# Altium PCB PCB3.PcbDoc
Units mm, origin at the board's own origin, x right, y up, seen from the top; angles counter-clockwise.
Board outline 122 x 63 mm, 3 copper layers (Top Layer, Internal Plane 1, Bottom Layer), stack 0.427 mm thick; 32 components, 32 nets, 124 pads, 30 vias.
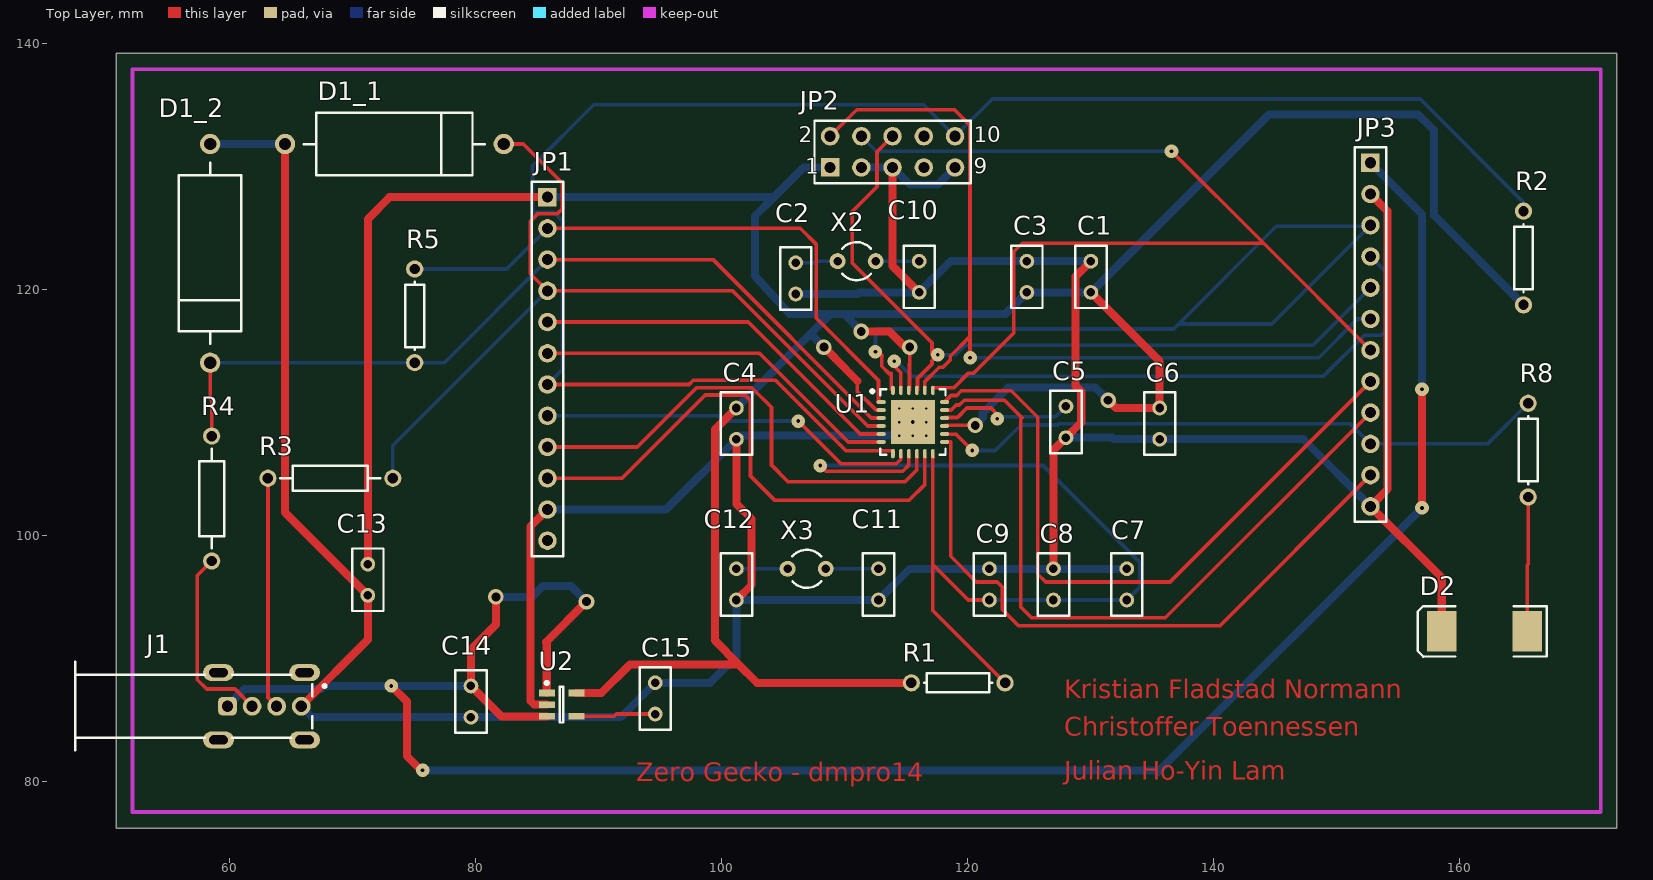
[diagram p0: Top Layer view]
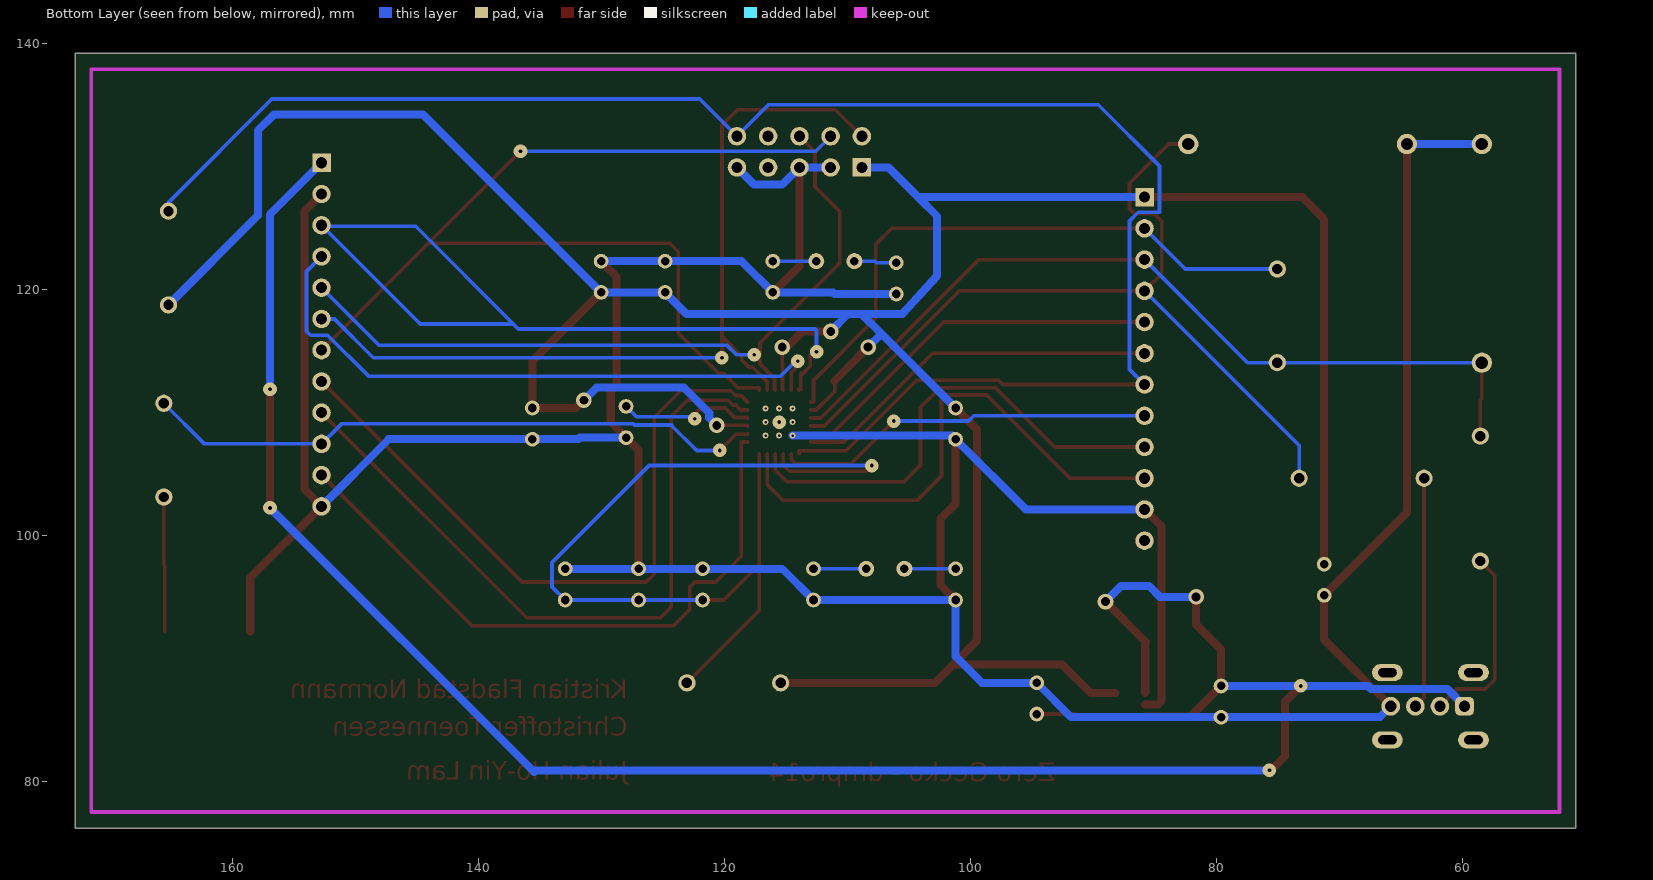
[diagram p1: Bottom Layer view, seen from below]
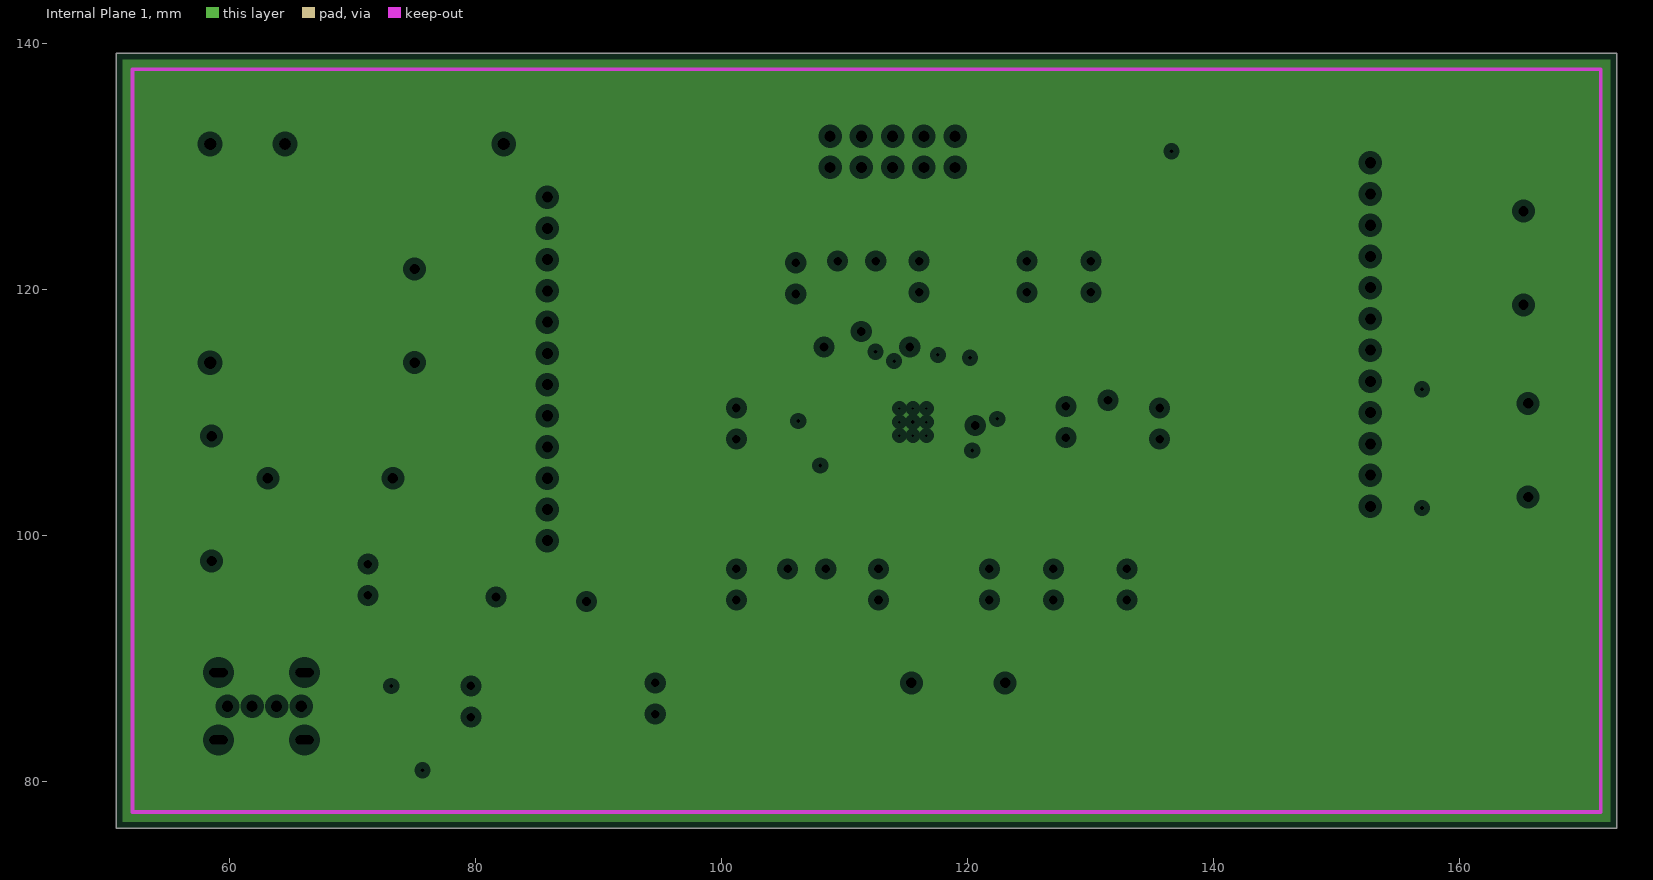
[diagram p2: Internal Plane 1, clearances drawn from the general rule]

## Layer stack, top to bottom
Top Solder: solder mask 0.0102, Solder Resist, Dk 3.5
Top Layer: signal copper 0.0356
Internal Plane 1: plane copper 0.0356
Dielectric 1: dielectric 0.32, FR-4, Dk 4.8
Bottom Layer: signal copper 0.0356
Bottom Solder: solder mask 0.0102, Solder Resist, Dk 3.5

## Board outline
50.8,76.2 172.8,76.2 172.8,139.2 50.8,139.2

## Design rules (kind name [scope] priority, off if disabled: settings)
Clearance [All] p1: gap=0.3
PlaneClearance [All] p1: clearance=0.508
PlaneConnect [All] p1: planeconnectstyle=Relief reliefexpansion=0.508 reliefentries=4 reliefconductorwidth=0.254 reliefairgap=0.254
PolygonConnect [All] p1: connectstyle=Relief reliefconductorwidth=0.254 reliefentries=4 polygonreliefangle="90 Angle" airgapwidth=0.254
RoutingVias RoutingVias_Signals [Not(InNet('GND') AND InNet('VDD') AND InNet('NetC14_2'))] p1: holewidth=0.3 width=1.1 viastyle="Through Hole" minholewidth=0.3 minwidth=1.1 maxholewidth=0.711 maxwidth=1.27
RoutingVias [All] p2: holewidth=0.8 width=1.6 viastyle="Through Hole" minholewidth=0.711 minwidth=1.27 maxholewidth=0.711 maxwidth=1.27
SolderMaskExpansion [All] p1: expansion=0.102
UnpouredPolygon [All] p1: allowunpoured=FALSE
Width Width_GDD_VDD_or_(NetC14_2) [(InNet('GND') OR InNet('VDD') OR InNet('NetC14_2'))] p1: maxlimit=0.653 minlimit=0.653 preferedwidth=0.653 // The tutorial wanted 25 mil width on these -> 0.653mm
Width [All] p2: maxlimit=0.3 minlimit=0.3 preferedwidth=0.3
27 further rules are at their usual default settings.

## Components (designator, comment, footprint, x,y, rotation, side; value= is the part's Value field where it differs from the comment)
C1 "Cap" RAD-0.1 130.048,121.031 r270 top
C2 "Cap" RAD-0.1 106.045,120.904 r90 top
C3 "Cap" RAD-0.1 124.841,121.031 r270 top
C4 "Cap" RAD-0.1 101.219,109.093 r90 top
C5 "Cap" RAD-0.1 128.016,109.22 r90 top
C6 "Cap" RAD-0.1 135.636,109.093 r90 top
C7 "Cap" RAD-0.1 132.969,96.012 r270 top
C8 "Cap" RAD-0.1 127,96.012 r270 top
C9 "Cap" RAD-0.1 121.793,96.012 r270 top
C10 "Cap" RAD-0.1 116.078,121.031 r90 top
C11 "Cap" RAD-0.1 112.776,96.012 r90 top
C12 "Cap" RAD-0.1 101.219,96.012 r90 top
C13 "Cap" RAD-0.1 71.247,96.393 r90 top
C14 "Cap" RAD-0.1 79.629,86.487 r90 top
C15 "Cap" RAD-0.1 94.615,86.741 r270 top
D1_1 "D Zener" DIODE-0.7 73.406,131.826 r0 top
D1_2 "D Zener" DIODE-0.7 58.42,122.936 r270 top
D2 "Diode" SMC 162.052,92.202 r180 top
J1 "48204-0001" MOLX-48204-0001_V 52.1,86.106 r270 top
JP1 "Header 12" HDR1X12 85.852,127.508 r270 top
JP2 "Header 5X2" HDR2X5 108.839,129.921 r0 top
JP3 "Header 12" HDR1X12 152.781,130.302 r270 top
R1 "Res1 10K" AXIAL-0.3 119.253,88.011 r180 top
R2 "Res1" AXIAL-0.3 165.227,122.555 r270 top
R3 "USB SPEC" AXIAL-0.4 68.199,104.648 r0 top
R4 "USB SPEC" AXIAL-0.4 58.547,102.997 r90 top
R5 "1.5K" AXIAL-0.3 75.057,117.856 r90 top
R8 "390" AXIAL-0.3 165.608,106.934 r270 top
U1 "EFM32ZG108F16-QFN24" ENMR-QFN24_M 115.57,109.22 r0 top
U2 "LT1761ES5-3.3#TRMPBF" LT-S5-5-TSOT-23_N 86.995,86.233 r0 top
X2 "XTAL" R38 110.998,122.301 r270 top
X3 "XTAL" R38 106.934,97.282 r90 top

## Footprints (in the part's own frame and the unit in brackets; to place one, negate y for a bottom-side part, rotate by r counter-clockwise, add the part's x,y. Pads: shape width x height; smd on the part's side, far side on the other; paste and mask are expansions set on the pad)
AXIAL-0.3 [mm] "Axial Device, Thru-Hole; 2 Leads; 0.3 in Pin Spacing"
  round 1.4 hole 0.85: 1(-3.81,0) 2(3.81,0)
  silkscreen extent -2.77,-0.76 2.77,0.76
AXIAL-0.4 [mm] "Axial Device, Thru-Hole; 2 Leads; 0.4 in Pin Spacing"
  round 1.4 hole 0.85: 1(-5.08,0) 2(5.08,0)
  silkscreen extent -4.06,-1.02 4.06,1.02
DIODE-0.7 [mm] "Diode, Thru-Hole; 2 Leads; 0.7 in Pin Spacing"
  round 1.65 hole 1: 1(-8.89,0) 2(8.89,0)
  silkscreen extent -7.37,-2.54 7.37,2.54
ENMR-QFN24_M [mm] "QFN, 24-Leads, Body 5x5mm, Pitch 0.65mm, Thermal Pad 3.6 x 3.6mm, IPC Low Density"
  rect 3.6x3.6 smd: 0(0,0)
  oval 0.75x0.3 smd: 1(-2.575,1.625) 2(-2.575,0.975) 3(-2.575,0.325) 4(-2.575,-0.325) 5(-2.575,-0.975) 6(-2.575,-1.625) 13(2.575,-1.625) 14(2.575,-0.975) 15(2.575,-0.325) 16(2.575,0.325) 17(2.575,0.975) 18(2.575,1.625)
  oval 0.3x0.75 smd: 7(-1.625,-2.575) 8(-0.975,-2.575) 9(-0.325,-2.575) 10(0.325,-2.575) 11(0.975,-2.575) 12(1.625,-2.575) 19(1.625,2.575) 20(0.975,2.575) 21(0.325,2.575) 22(-0.325,2.575) 23(-0.975,2.575) 24(-1.625,2.575)
  silkscreen extent -3.42,-2.65 2.65,2.65, body extent -2.5,-2.5 2.5,2.5, height 0.9
HDR1X12 [mm] "Connector; Header; 12 Position"
  rect 1.5x1.5 hole 0.9: 1(0,0)
  round 1.5 hole 0.9: 2(2.54,0) 3(5.08,0) 4(7.62,0) 5(10.16,0) 6(12.7,0) 7(15.24,0) 8(17.78,0) 9(20.32,0) 10(22.86,0) 11(25.4,0) 12(27.94,0)
  silkscreen extent -1.27,-1.27 29.21,1.27
HDR2X5 [mm] "Connector; Header; 5x2 Position"
  rect 1.5x1.5 hole 0.9: 1(0,0)
  round 1.5 hole 0.9: 2(0,2.54) 3(2.54,0) 4(2.54,2.54) 5(5.08,0) 6(5.08,2.54) 7(7.62,0) 8(7.62,2.54) 9(10.16,0) 10(10.16,2.54)
  silkscreen extent -1.27,-1.27 11.43,3.81
LT-S5-5-TSOT-23_N [mm] "SOT23, 5-Leads, Body 2.90x1.63mm, Pitch 0.95mm, IPC Medium Density"
  rect 1.3x0.55 smd: 1(-1.2,0.95) 2(-1.2,0) 3(-1.2,-0.95) 4(1.2,-0.95) 5(1.2,0.95)
  silkscreen extent -1.32,-1.45 0.15,1.9, body extent -0.87,-1.45 0.87,1.45, height 1
MOLX-48204-0001_V [mm] "USB Type-A Up-Right Reverse Connector"
  rrect50% 1.52x1.52 hole 0.9: 1(0,7.73)
  round 1.52 hole 0.9: 2(0,9.73) 3(0,11.73) 4(0,13.73)
  oval 1.4x2.5 hole 0.75 slot 1.5 at 90 deg: MH1(-2.735,7) MH2(2.735,7) MH3(-2.735,14) MH4(2.735,14)
  silkscreen extent -3.6,-4.64 3.6,15.75, body extent -3.61,-4.71 3.59,14.54, height 14.68
R38 [mm] "Crystal, Thru-Hole; 2 Leads; Body 3.1 x 8.2 mm (Dia.xH)"
  round 1.3 hole 0.7: 1(0,1.55) 2(0,-1.55)
  silkscreen extent -1.55,-1.19 1.55,1.17
RAD-0.1 [mm] "Radial Cap, Thru-Hole; 2 Leads; 0.1 in Pin Spacing"
  round 1.2 hole 0.7: 1(-1.27,0) 2(1.27,0)
  silkscreen extent -2.54,-1.27 2.54,1.27
SMC [mm] "DO-214-AB/SMC; 2 C-Bend Leads; Body 7.9 x 5.9 mm, inc. leads (LxW)"
  rect 2.4x3.3 smd: 1(-3.475,0) 2(3.475,0)
  silkscreen extent -5.08,-2.05 5.42,2.06

## Part data
C1 C2 C3 C4 C5 C6 C7 C8 C9 C10 C11 C12 C13 C14 C15: "Capacitor"
D1_1 D1_2: "Zener Diode"
D2: "Default Diode"
J1: library part CMP-0411-00001-1, "USB Shielded I/O Receptacle, Type A"
JP1 JP3: "Header, 12-Pin"
JP2: "Header, 5-Pin, Dual row"
R1 R5 R8: library part Res1, "Resistor"
R2: "Resistor"
R3 R4: library part Res2, "Resistor"
U1: library part CMP-0270-00117-1, "EFM32 Zero Gecko, M0+ ARM Cortex CPU, 16 KB Flash, 4 KB RAM, 1.85 - 3.8 V Supply, 32 MHz Max Speed, -40 to 85 degC, 24-Pin QFN, RoHS Compliant"
U2: library part CMP-0476-01224-1, "100 mA, Low Noise, LDO Micropower Regulator, 1.8 to 20 V Vin, 3.3 V Vout, 5-pin SOT23 (S5-5), -40 to 125 degC, Pb-Free, Mini Tape and Reel"
X2 X3: "Crystal Oscillator"

## Via types
v1: diameter 1.1, hole 0.3, Top Layer to Bottom Layer, 14 vias
v2: diameter 0.5, hole 0.2, Top Layer to Bottom Layer, 9 vias
v3: diameter 1.27, hole 0.711, Top Layer to Bottom Layer, 7 vias

## Nets (pads, with @x,y where several pads share a name; then routed paths per layer and width w, separated by ;. In a path a pad name is that pad's centre, name@x,y a point inside that pad or via, vN(x,y) a via of type N, cw(c..) or ccw(c..) an arc to the next point about the centre after c; other vN are vias at no path point)
GND: C1.1 C2.1 C3.1 C4.1 C5.1 C6.1 C7.1 C8.1 C9.1 C10.1 C11.1 C12.1 C13.1 C14.1 C15.1 D1_1.1 D1_2.1 D2.2 J1.4 JP1.11 JP2.3 JP2.5 JP2.9 JP3.2 JP3.12 U1.0 U2.2 | length 332.7
  Top Layer w0.653: D1_1.1 64.516,101.854 C13.1 71.247,91.523 J1.4 ; U2.2 84.772,86.233 84.455,86.55 84.455,100.711 JP1.11 ; C12.1 102.464,95.987 102.464,101.321 101.219,102.565 C4.1 ; JP2.5 113.919,121.92 C10.1 ; C8.1 127,106.934 C5.1 129.261,109.195 129.261,111.709 128.803,112.166 128.803,121.056 C1.1 ; JP3.2 154.178,126.365 154.178,103.759 JP3.12 158.577,96.566 D2.2
  Bottom Layer w0.653: D1_2.1 D1_1.1 ; J1.4 66.719,85.217 C14.1 91.821,85.217 C15.1 99.06,88.011 101.219,90.17 C12.1 C11.1 115.316,97.282 C9.1 C8.1 C7.1 ; JP1.11 95.504,102.108 C4.1 101.516,108.12 105.761,108.12 107.358,108.12 v2(114.47,108.12) ; C2.1 111.074,119.634 111.201,119.761 C10.1 118.618,122.301 C3.1 C1.1 ; JP2.3 JP2.5 115.316,128.524 117.602,128.524 JP2.9 ; C5.1 131.75,107.95 131.877,107.823 C6.1 147.32,107.823 JP3.12
  other v1: 115.57,109.22
  other v2: 115.57,108.12 116.67,108.12 114.47,109.22 115.57,109.22 116.67,109.22 114.47,110.32 115.57,110.32 116.67,110.32
NetC2_2: C2.2 X2.2 | length 3.5
  Bottom Layer w0.3: C2.2 107.671,122.174 107.798,122.301 X2.2
NetC5_2: C5.2 U1.16 | length 11.2
  Top Layer w0.3: U1.16 118.195,109.595 119.189,109.595 119.957,110.363 121.92,110.363 122.428,109.855 v1(122.428,109.474)
  Bottom Layer w0.3: v1(122.428,109.474) 122.598,109.644 127.17,109.644 C5.2
NetC7_2: C7.2 C8.2 C9.2 R1.1 U1.9 U1.12 | length 79.3
  Top Layer w0.3: v1(108.032,105.679) 108.491,105.22 114.737,105.22 115.245,105.727 U1.9 ; U1.12 117.195,97.614 ; C9.2 120.067,94.742 117.195,97.614 ; R1.1 117.195,93.879 117.195,97.614
  Bottom Layer w0.3: v1(108.032,105.679) 126.147,105.679 134.036,97.79 134.036,95.809 C7.2 C8.2 C9.2
NetC10_2: C10.2 X2.1 | length 3.5
  Bottom Layer w0.3: X2.1 C10.2
NetC11_2: C11.2 X3.2 | length 4.3
  Bottom Layer w0.3: X3.2 C11.2
NetC12_2: C12.2 X3.1 | length 4.2
  Bottom Layer w0.3: C12.2 X3.1
NetC14_2: C14.2 J1.1 JP3.1 U2.1 U2.3 | length 180.9
  Top Layer w0.653: v1(73.152,87.757) 74.422,86.487 74.422,82.042 75.565,80.899 v1(75.692,80.899) ; v3(81.661,94.996) 81.661,92.742 79.629,90.71 C14.2 82.103,85.283 U2.3 ; U2.1 85.795,91.243 85.725,91.313 v3(89.027,94.615) ; v1(156.972,102.235) v1(156.972,111.887)
  Bottom Layer w0.653: J1.1 61.227,87.503 67.437,87.503 67.691,87.757 v1(73.152,87.757) C14.2 ; v1(75.692,80.899) 135.382,80.899 135.509,80.772 v1(156.972,102.235) ; v3(81.661,94.996) 84.582,94.996 85.471,95.885 87.757,95.885 v3(89.027,94.615) ; JP3.1 156.972,126.111 v1(156.972,111.887)
NetC15_2: C15.2 U2.4 | length 6.5
  Top Layer w0.3: U2.4 91.288,85.283 91.476,85.471 C15.2
NetD1_1_2: D1_1.2 JP1.4 R3.2 U1.4 | length 69.6
  Top Layer w0.3: D1_1.2 83.883,131.826 87.071,128.638 87.071,126.562 86.677,126.168 85.09,126.168 84.455,125.533 84.455,121.285 JP1.4 100.902,119.888 111.895,108.895 U1.4
  Bottom Layer w0.3: R3.2 73.279,107.315 JP1.4
NetD1_2_2: D1_2.2 JP1.3 R4.2 R5.1 U1.3 | length 69.4
  Top Layer w0.3: D1_2.2 58.42,111.125 58.547,110.998 R4.2 ; JP1.3 99.309,122.428 112.192,109.545 U1.3
  Bottom Layer w0.3: D1_2.2 R5.1 77.47,114.046 JP1.3
NetD2_1: D2.1 R8.2 | length 11
  Top Layer w0.3: D2.1 165.527,97.582 165.608,97.663 R8.2
NetJ1_2: J1.2 R4.1 | length 15.5
  Top Layer w0.3: R4.1 57.379,96.749 57.379,88.265 58.141,87.503 60.433,87.503 J1.2
NetJ1_3: J1.3 R3.1 | length 18.8
  Top Layer w0.3: R3.1 63.119,86.817 J1.3
NetJP1_2: JP1.2 R5.2 U1.1 | length 49.7
  Top Layer w0.3: JP1.2 106.401,124.968 107.721,123.647 107.721,117.653 112.776,112.598 112.776,110.845 U1.1
  Bottom Layer w0.3: R5.2 82.55,121.666 JP1.2
NetJP1_5: JP1.5 U1.5 | length 30.9
  Top Layer w0.3: JP1.5 102.187,117.348 111.29,108.245 U1.5
NetJP1_6: JP1.6 U1.6 | length 30.1
  Top Layer w0.3: JP1.6 103.099,114.808 110.312,107.595 U1.6
NetJP1_7: JP1.7 JP2.10 R2.1 U1.7 | length 140.3
  Top Layer w0.3: JP1.7 97.358,112.268 97.703,112.613 104.389,112.613 110.123,106.879 113.945,106.879 U1.7
  Bottom Layer w0.3: JP1.7 87.071,113.487 87.071,125.578 86.36,126.289 84.633,126.289 84.633,130.048 89.611,135.026 116.434,135.026 JP2.10 122.022,135.484 156.82,135.484 165.227,127.076 R2.1
NetJP1_8: JP1.8 U1.8 | length 31
  Top Layer w0.3: v1(106.248,109.296) 109.724,105.82 114.218,105.82 114.595,106.197 U1.8
  Bottom Layer w0.3: JP1.8 99.746,109.728 100.178,109.296 105.131,109.296 v1(106.248,109.296)
NetJP1_9: JP1.9 U1.10 | length 39.7
  Top Layer w0.3: JP1.9 93.145,107.188 97.97,112.013 102.465,112.013 104.064,110.414 104.064,105.715 105.41,104.369 114.935,104.369 115.895,105.329 U1.10
NetJP1_10: JP1.10 U1.11 | length 43.7
  Top Layer w0.3: JP1.10 91.914,104.648 98.679,111.413 101.917,111.413 102.362,110.969 102.362,104.826 104.318,102.87 115.275,102.87 116.545,104.14 U1.11
NetJP1_12: JP1.12
NetJP2_2: JP2.2 JP3.6 U1.20 | length 71.6
  Top Layer w0.3: JP2.2 110.998,134.62 118.948,134.62 120.218,133.35 120.218,116.18 ; U1.20 116.545,112.507 117.719,113.681 118.016,113.681 118.602,114.267 118.602,114.564 120.218,116.18 ; v1(120.218,114.452) 120.218,116.18
  Bottom Layer w0.3: v1(120.218,114.452) 148.571,114.452 151.721,117.602 JP3.6
NetJP2_4: JP2.4 JP3.7 U1.19 | length 84.5
  Top Layer w0.3: U1.19 117.195,112.014 118.917,112.014 120.101,113.198 120.513,113.198 123.774,116.459 123.774,123.063 124.46,123.749 144.094,123.749 ; v1(136.601,131.242) 144.094,123.749 ; JP3.7 144.094,123.749
  Bottom Layer w0.3: JP2.4 112.598,131.242 v1(136.601,131.242)
NetJP2_6: JP2.6 JP3.5 U1.21 | length 62.9
  Top Layer w0.3: JP2.6 112.649,131.191 112.649,128.346 110.642,126.34 110.642,122.149 117.122,115.669 v1@117.122,114.681 ; U1.21 115.945,111.845 115.945,112.755 117.122,113.932 117.122,114.201 v1(117.602,114.681)
  Bottom Layer w0.3: v1(117.602,114.681) 119.033,114.681 119.804,115.452 148.091,115.452 JP3.5
NetJP3_3: JP3.3 U1.24 | length 68.4
  Top Layer w0.3: v1(112.522,114.935) 112.751,114.935 113.065,114.621 113.065,114.606 113.046,114.587 113.046,113.759 113.632,113.173 113.797,113.173 113.82,113.15 113.82,111.883 113.945,111.883 U1.24
  Bottom Layer w0.3: v1(112.522,114.935) 112.522,116.688 112.624,116.789 136.779,116.789 137.185,117.196 ; JP3.3 JP3.3@152.692,125.133 ; 137.185,117.196 145.123,125.133 JP3.3@152.692,125.133 ; 137.185,117.196 144.755,117.196 JP3.3@152.692,125.133
NetJP3_4: JP3.4 U1.23 | length 51.9
  Top Layer w0.3: v1(114.046,114.173) 113.685,114.173 113.665,114.153 114.595,113.223 U1.23
  Bottom Layer w0.3: v1(114.046,114.173) 114.046,114.351 115.443,112.954 148.971,112.954 152.298,116.281 153.67,116.281 154,116.611 154,121.463 JP3.4
NetJP3_8: JP3.8 U1.18 | length 55.7
  Top Layer w0.3: U1.18 118.679,111.379 119.13,111.379 119.511,111.76 123.571,111.76 125.73,109.601 125.73,96.85 126.365,96.215 136.474,96.215 JP3.8
NetJP3_9: JP3.9 U1.17 | length 58.4
  Top Layer w0.3: U1.17 118.687,110.195 119.093,110.601 119.347,110.601 119.744,110.998 123.014,110.998 124.444,109.568 124.333,109.457 124.333,94.183 125.222,93.294 136.093,93.294 JP3.9
NetJP3_10: JP3.10 R8.1 U1.14 | length 51
  Top Layer w0.3: U1.14 118.17,108.22 119.085,108.22 v1(120.396,106.909)
  Bottom Layer w0.3: v1(120.396,106.909) 122.276,106.909 124.333,108.966 124.317,108.982 127.357,108.982 127.442,109.068 151.155,109.068 JP3.10 162.306,107.442 R8.1
NetJP3_11: JP3.11 U1.13 | length 52.4
  Top Layer w0.3: U1.13 118.643,107.595 118.643,98.298 120.726,96.215 122.437,96.215 122.843,95.809 122.843,93.98 124.164,92.659 140.538,92.659 JP3.11
VDD: C1.2 C3.2 C4.2 C6.2 C13.2 JP1.1 JP2.1 R1.2 R2.2 U1.2 U1.15 U1.22 U2.5 | length 268.1
  Top Layer w0.3: 111.049,112.573 111.049,111.709 112.563,110.195 U1.2 ; U1.22 115.295,111.845 115.295,113.97 115.316,113.991 v3(115.316,115.316) ; U1.15 118.195,108.945 v3(120.65,108.945)
  Top Layer w0.653: C13.2 71.247,125.73 73.025,127.508 JP1.1 ; U2.5 90.231,87.183 92.558,89.51 101.397,89.51 ; C4.2 99.466,108.61 99.466,91.44 101.397,89.51 ; v3(108.331,115.316) 109.223,114.424 109.223,114.399 111.049,112.573 ; v3@111.125,116.586 v3(111.379,116.586) 113.665,116.586 114.935,115.316 v3(115.316,115.316) ; R1.2 102.895,88.011 101.397,89.51 ; C1.2 135.636,114.173 C6.2 132.08,110.363 v3(131.445,110.998)
  Bottom Layer w0.653: JP1.1 104.267,127.508 ; C4.2 107.251,116.395 ; v3(108.331,115.316) 107.251,116.395 ; JP2.1 106.68,129.921 104.267,127.508 ; v3(111.379,116.586) 109.982,117.983 109.982,118.008 ; v3(120.65,108.945) 121.251,109.547 121.251,109.961 123.304,112.014 130.429,112.014 v3(131.445,110.998) ; R2.2 157.963,126.009 157.963,132.918 156.642,134.239 144.526,134.239 C1.2 C3.2 123.088,118.008 109.982,118.008 ; 104.267,127.508 102.711,125.952 102.711,121.118 105.537,118.008 108.864,118.008 ; 107.251,116.395 108.864,118.008 ; 108.864,118.008 109.982,118.008
pads on no net: J1.MH1 J1.MH2 J1.MH3 J1.MH4 JP2.7 JP2.8

## Keep-outs
Keep-Out Layer:
  lines w0.3: 52.1,77.5 171.5,77.5 171.5,137.9 52.1,137.9 52.1,77.5

## Other copper
Top Layer:
  text "Kristian Fladstad Normann" at 127.889,86.741 h1.52
  text "Christoffer Toennessen" at 127.889,83.693 h1.52
  text "Julian Ho-Yin Lam" at 127.889,80.137 h1.52
  text "Zero Gecko - dmpro14" at 93.091,80.01 h1.52

## Text inside footprints (layer, text, board x,y; h text height)
J1: Mechanical 1 "PCB Edge" at 52.4,87.606 h0.4 r270
JP2: Top Overlay "2" at 106.299,131.953 h1.27; Top Overlay "1" at 106.807,129.413 h1.27; Top Overlay "9" at 120.523,129.413 h1.27; Top Overlay "10" at 120.523,131.953 h1.27